# Altium PCB PCB2.PcbDoc
Units mm, origin at the board's own origin, x right, y up, seen from the top; angles counter-clockwise.
Board outline 58.25 x 96.25 mm, 2 copper layers (Top Layer, Bottom Layer); 32 components, 25 nets, 166 pads, 0 vias.
Unrouted connection lines stored in the file: 104.
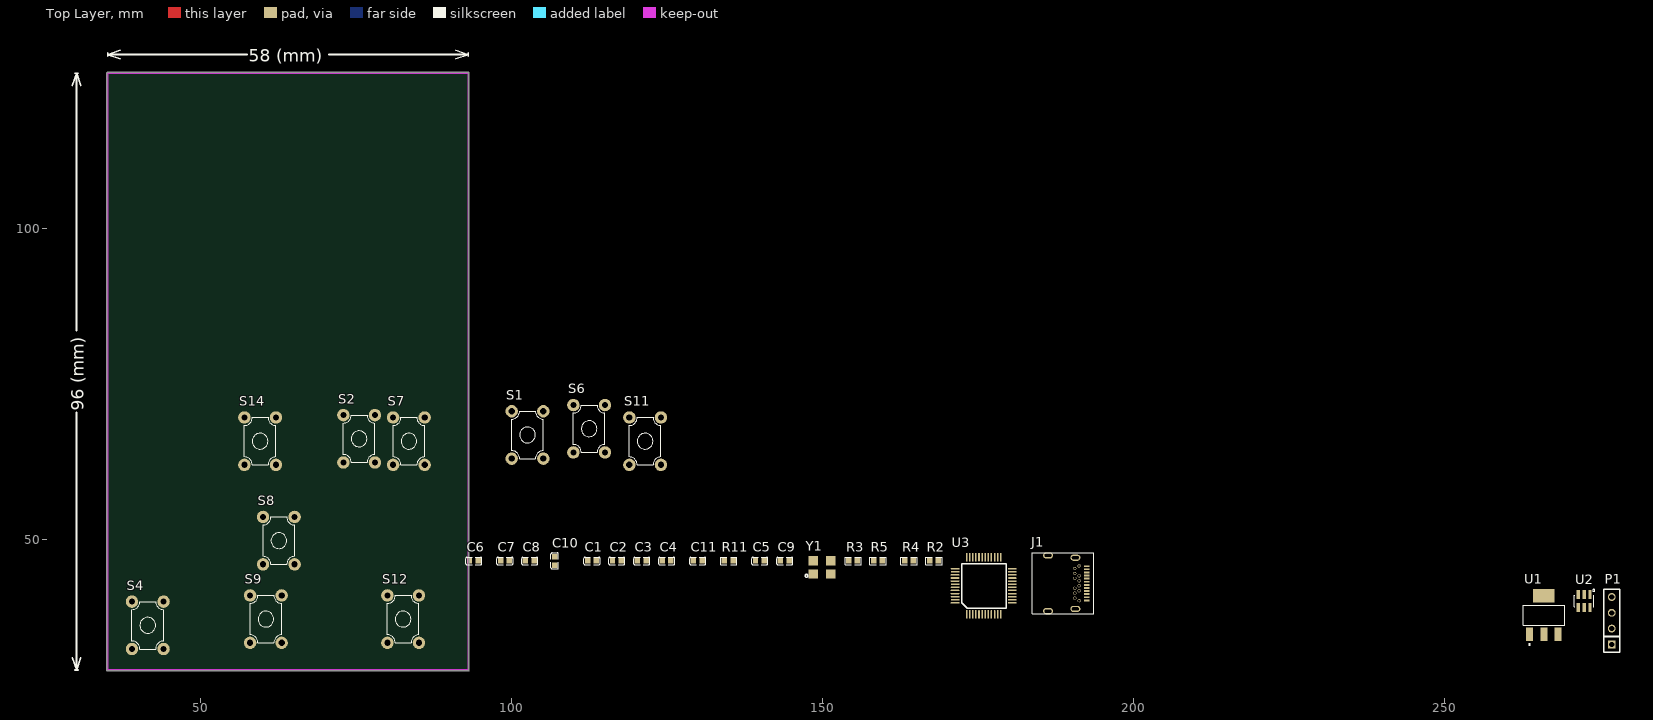
[diagram p0: Top Layer view]
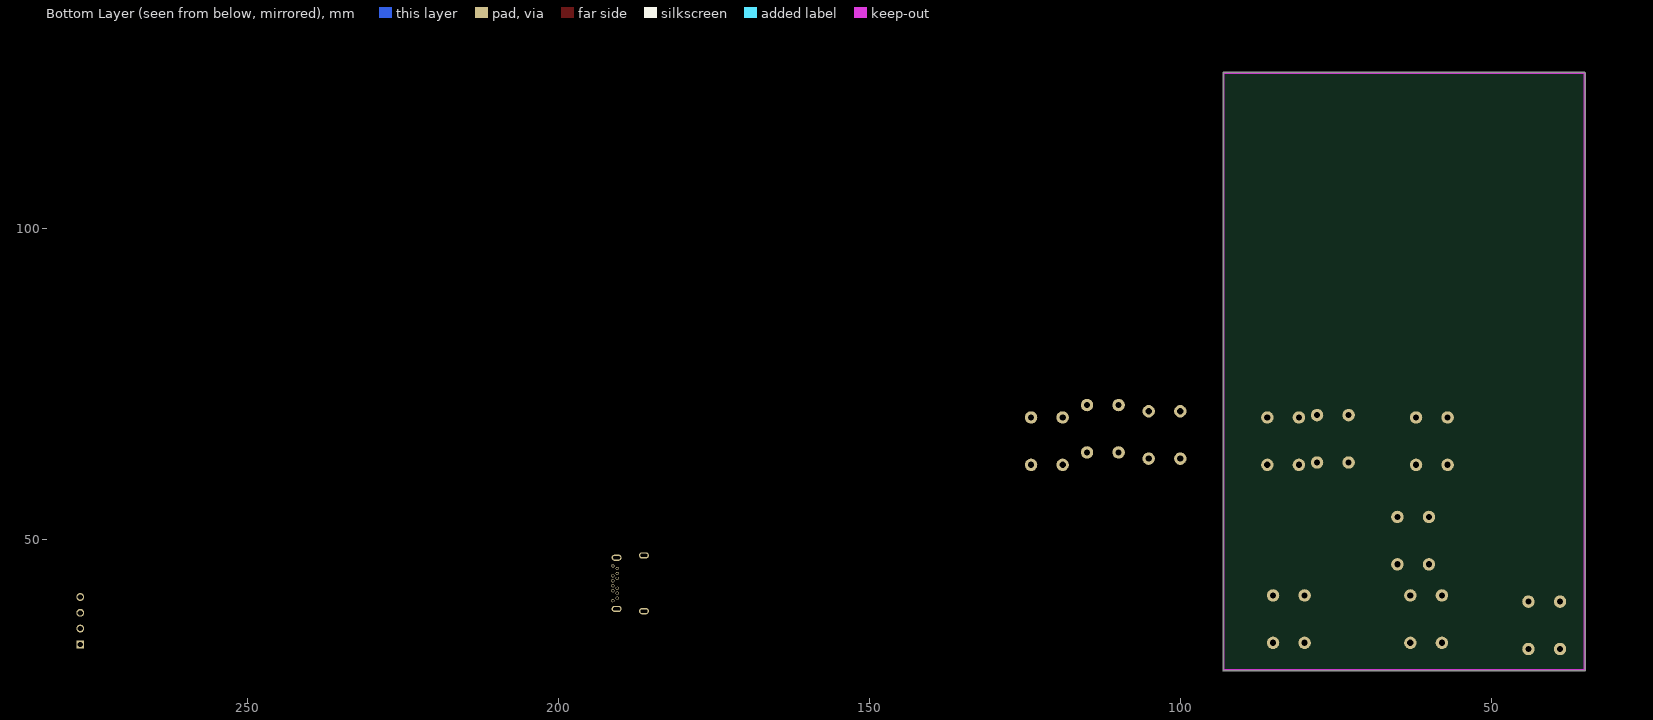
[diagram p1: Bottom Layer view, seen from below]

## Layer stack, top to bottom
Top Solder: solder mask 0.0102, Solder Resist, Dk 3.5
Top Layer: signal copper 0.0356
Dielectric 1: dielectric 0.32, FR-4, Dk 4.8
Bottom Layer: signal copper 0.0356
Bottom Solder: solder mask 0.0102, Solder Resist, Dk 3.5

## Board outline
34.873,29 ccw(c35,29) 35,28.873 93,28.873 ccw(c93,29) 93.127,29 93.127,125 ccw(c93,125) 93,125.127 35,125.127 ccw(c35,125) 34.873,125

## Design rules (kind name [scope] priority, off if disabled: settings)
Clearance [All] p1: gap=0.254 ignorepadtopadclearanceinfootprint=FALSE except(0: Arc-Hole Track-Hole SMDPad-Hole THPad-Hole Via-Hole Fill-Hole Poly-Hole Region-Hole Text-Hole)
PolygonConnect [All] p1: connectstyle=Relief reliefconductorwidth=0.254 reliefentries=4 polygonreliefangle="90 Angle" airgapwidth=0.254
RoutingVias [All] p1: holewidth=0.711 width=1.27 viastyle="Through Hole" minholewidth=0.711 minwidth=1.27 maxholewidth=0.711 maxwidth=1.27
SolderMaskExpansion [All] p1: expansion=0.102 istentingtop=FALSE
Width [All] p1: maxlimit=0.254 minlimit=0.254 preferedwidth=0.254
30 further rules are at their usual default settings.

## Components (designator, comment, footprint, x,y, rotation, side; value= is the part's Value field where it differs from the comment)
C1 "10UF" C0603 112.908,46.551 r0 top
C2 "100NF" C0603 116.908,46.551 r0 top
C3 "100NF" C0603 120.908,46.551 r0 top
C4 "10UF" C0603 124.908,46.551 r0 top
C5 "22PF" C0603 139.908,46.551 r0 top
C6 "100NF" C0603 93.908,46.551 r0 top
C7 "100NF" C0603 98.908,46.551 r0 top
C8 "100NF" C0603 102.908,46.551 r0 top
C9 "22PF" C0603 143.908,46.551 r0 top
C10 "100NF" C0603 106.908,46.551 r90 top
C11 "100NF" C0603 129.908,46.551 r0 top
J1 "TYPE-C_24" TYPE-C24P 191.908,46.551 r0 top
P1 "SIP4" SIP4 276.927,36.936 r90 top
R2 "4.7K" R0603 167.908,46.551 r0 top
R3 "4.7K" R0603 154.908,46.551 r0 top
R4 "10R" R0603 163.908,46.551 r0 top
R5 "10R" R0603 158.908,46.551 r0 top
R11 "1K" R0603 134.908,46.551 r0 top
S1 "BUTTON2" KEY 100,70.62 r0 top
S2 "BUTTON2" KEY 72.92,70 r0 top
S4 "BUTTON2" KEY 38.92,40 r0 top
S6 "BUTTON2" KEY 109.92,71.62 r0 top
S7 "BUTTON2" KEY 80.92,69.62 r0 top
S8 "BUTTON2" KEY 60,53.62 r0 top
S9 "BUTTON2" KEY 57.92,41 r0 top
S11 "BUTTON2" KEY 118.92,69.62 r0 top
S12 "BUTTON2" KEY 80,41 r0 top
S14 "BUTTON2" KEY 57,69.62 r0 top
U1 "LM1117-3.3" SOT223 266.005,37.698 r0 top
U2 "USBLC6-2" SOT23-6 272.482,40.111 r0 top
U3 "STM32F103-48" LQFP48 175.908,42.551 r0 top
Y1 "8M" XTAL-3225-4 149.908,45.551 r0 top

## Footprints (in the part's own frame and the unit in brackets; to place one, negate y for a bottom-side part, rotate by r counter-clockwise, add the part's x,y. Pads: shape width x height; smd on the part's side, far side on the other; paste and mask are expansions set on the pad)
C0603 [mm]
  rect 0.88x0.9 smd mask+0: 1(-0.7,0) 2(0.7,0)
  silkscreen extent -1.3,-0.6 1.3,0.6
KEY [mm]
  round 2 hole 1: 1(0,-7.62) 1(0,0) 2(5.08,-7.62) 2(5.08,0)
  silkscreen extent 0,-7.62 5.08,0
LQFP48 [mm]
  rect 0.254x1.4 smd: 1(-2.75,-4.6)
  oval 0.254x1.4 smd: 2(-2.25,-4.6) 3(-1.75,-4.6) 4(-1.25,-4.6) 5(-0.75,-4.6) 6(-0.25,-4.6) 7(0.25,-4.6) 8(0.75,-4.6) 9(1.25,-4.6) 10(1.75,-4.6) 11(2.25,-4.6) 12(2.75,-4.6) 25(2.75,4.6) 26(2.25,4.6) 27(1.75,4.6) 28(1.25,4.6) 29(0.75,4.6) 30(0.25,4.6) 31(-0.25,4.6) 32(-0.75,4.6) 33(-1.25,4.6) 34(-1.75,4.6) 35(-2.25,4.6) 36(-2.75,4.6)
  oval 1.4x0.254 smd: 13(4.6,-2.75) 14(4.6,-2.25) 15(4.6,-1.75) 16(4.6,-1.25) 17(4.6,-0.75) 18(4.6,-0.25) 19(4.6,0.25) 20(4.6,0.75) 21(4.6,1.25) 22(4.6,1.75) 23(4.6,2.25) 24(4.6,2.75) 37(-4.6,2.75) 38(-4.6,2.25) 39(-4.6,1.75) 40(-4.6,1.25) 41(-4.6,0.75) 42(-4.6,0.25) 43(-4.6,-0.25) 44(-4.6,-0.75) 45(-4.6,-1.25) 46(-4.6,-1.75) 47(-4.6,-2.25) 48(-4.6,-2.75)
  silkscreen extent -3.51,-3.58 3.6,3.53, body extent -4.5,-4.5 4.5,4.5, height 1.45
R0603 [mm]
  rect 0.88x0.9 smd mask+0: 1(-0.7,0) 2(0.7,0)
  silkscreen extent -1.3,-0.6 1.3,0.6, body extent -0.8,-0.41 0.8,0.41, height 0.45
SIP4 [mil]
  rect 50x50 hole 32: 1(-150,0)
  round 50 hole 32: 2(-50,0) 3(50,0) 4(150,0)
  silkscreen extent -200,-50 200,50
SOT23-6 [mm] "SOT-23/SC-74A; 5 Leads; Body 3.1 x 3 mm, inc. leads (LxW max)"
  rect 0.55x1.45 smd: 1(0.95,1.075) 2(0,1.075) 3(-0.95,1.075) 4(-0.95,-1.075) 5(0,-1.075) 6(0.95,-1.075)
  silkscreen extent -1.55,-0.9 1.73,1.88, body extent -1.43,-1.2 1.49,1.14, height 1
SOT223 [mm]
  rect 1.1x2.15 smd: 1(-2.3,-2.973) 2(0,-2.973) 3(2.3,-2.973)
  rect 3.5x2.15 smd: 4(0,3.227)
  silkscreen extent -3.35,-4.72 3.35,1.75
TYPE-C24P [mm]
  oval 1.6x1 hole 0.5 slot 1.1 at 0 deg: 0(-5.64,-8.09) 0(-5.64,0.89) 0(-1.25,-7.72) 0(-1.25,0.52)
  rect 0.9x0.3 smd: 1(0.56,-0.85) 2(0.56,-1.35) 3(0.56,-1.85) 4(0.56,-2.35) 5(0.56,-2.85) 6(0.56,-3.35) 7(0.56,-3.85) 8(0.56,-4.35) 9(0.56,-4.85) 10(0.56,-5.35) 11(0.56,-5.85) 12(0.56,-6.35)
  round 0.5 hole 0.35: 13(-0.65,-6.4) 14(-1.35,-6) 15(-1.35,-5.2) 16(-0.65,-4.8) 17(-1.35,-4.4) 18(-0.65,-4) 19(-0.65,-3.2) 20(-1.35,-2.8) 21(-0.65,-2.4) 22(-1.35,-2) 23(-1.35,-1.2) 24(-0.65,-0.8)
  silkscreen extent -8.18,-8.48 1.69,1.27, body extent -8.58,-8.74 1.95,1.49, height 2.58
XTAL-3225-4 [mm]
  rect 1.5x1.5 smd: 1(-1.4,-1.1) 2(1.4,-1.1) 3(1.4,1) 4(-1.4,1)
  silkscreen extent -2.72,-1.62 -2.28,-1.18, body extent -1.6,-1.25 1.6,1.25, height 0.7

## Part data
C1 C2 C3 C4 C5 C6 C7 C8 C9 C10 C11: library part C0603, "贴片电容"
P1: "连接器", LatestRevisionDate=17-Jul-2002, LatestRevisionNote="Re-released for DXP Platform.", Publisher="Altium Limited"
R2 R3 R4 R5 R11: library part R-0603, "贴片电阻"
S1 S2 S4 S6 S7 S8 S9 S11 S12 S14: "按钮", LatestRevisionDate=17-Jul-2002, LatestRevisionNote="Re-released for DXP Platform.", PackageDescription="Switch; 2 Leads", PackageReference=SPST-2, Published=24-Mar-1999, Publisher="Altium Limited"
U1: library part 1117, "芯片", LatestRevisionDate=17-Jul-2002, LatestRevisionNote="Re-released for DXP Platform.", Publisher="Altium Limited"
Y1: library part XTAL-4-W, "无源晶振", LatestRevisionDate=17-Jul-2002, LatestRevisionNote="Re-released for DXP Platform.", PackageDescription="Crystal, Thru-Hole; 2 Leads; Body 3.1 x 8.2 mm (Dia.xH)", PackageReference=R38, Published=8-Jun-2000, Publisher="Altium Limited"

## Nets (pads, with @x,y where several pads share a name; then routed paths per layer and width w, separated by ;. In a path a pad name is that pad's centre, name@x,y a point inside that pad or via, vN(x,y) a via of type N, cw(c..) or ccw(c..) an arc to the next point about the centre after c; other vN are vias at no path point)
B1: U3.39
B2: U3.40
B3: U3.41
B4: U3.38
D+: R4.2 U3.33
D-: R5.2 U3.32
GND: C1.1 C2.1 C3.1 C4.1 C5.1 C6.1 C7.1 C8.1 C9.1 C10.1 C11.1 J1.0 J1.1 J1.12 J1.13 J1.24 P1.4 R3.1 U1.1 U2.2 U3.8 U3.23 U3.35 U3.44 U3.47
H1: S1.1 S2.1 S4.1
H2: S6.1 S7.1 S8.1 S9.1
H3: S11.1 S12.1 S14.1
L1: S1.2 S6.2 S11.2 U3.16
L2: S2.2 S7.2 S12.2 U3.15
L3: S8.2 U3.14
L4: S4.2 S9.2 S14.2 U3.13
NetC5_2: C5.2 U3.5 Y1.1
NetC9_2: C9.2 U3.6 Y1.3
NetC11_2: C11.2 R11.1 U3.7
NetR2_1: R2.1 R4.1 U2.6
NetR3_2: R3.2 R5.1 U2.4
SWCLK: P1.2 U3.37
SWDIO: P1.3 U3.34
USB5V-IN: C1.2 C2.2 J1.4 J1.9 J1.16 J1.21 U1.3 U2.5
USB_DM: J1.7 J1.19 U2.3
USB_DP: J1.6 J1.18 U2.1
VCC: C3.2 C4.2 C6.2 C7.2 C8.2 C10.2 P1.1 R2.2 R11.2 U1.2 U1.4 U3.1 U3.9 U3.24 U3.36 U3.48
pads on no net: J1.2 J1.3 J1.5 J1.8 J1.10 J1.11 J1.14 J1.15 J1.17 J1.20 J1.22 J1.23 U3.2 U3.3 U3.4 U3.10 U3.11 U3.12 U3.17 U3.18 U3.19 U3.20 U3.21 U3.22 U3.25 U3.26 U3.27 U3.28 U3.29 U3.30 U3.31 U3.42 U3.43 U3.45 U3.46 Y1.2 Y1.4

## Keep-outs
Keep-Out Layer:
  lines w0.254: 38,125 35,125 ; 35,125 35,29 90,29 93,29 93,125 90,125 35,125

## Silkscreen, mask and mechanical layers (free items; w line width, h text height)
Top Overlay:
  lines w0.254: 29.333,31 30,29 ; 29.333,123 30,125 ; 29.746,29 30.254,29 ; 29.746,125 30.254,125 ; 30,70.429 30,29 ; 30,83.571 30,125 ; 30.667,31 30,29 ; 30.667,123 30,125 ; 35,127.746 35,128.254 ; 37,127.333 35,128 ; 37,128.667 35,128 ; 57.429,128 35,128 ; 70.571,128 93,128 ; 91,127.333 93,128 ; 91,128.667 93,128 ; 93,127.746 93,128.254
  text "58 (mm)" at 57.683,126.848 h2
  text "96 (mm)" at 31.152,70.683 h2 r90